# EAGLE board VNH7070AS motor driver (EAGLE 9.5.2)
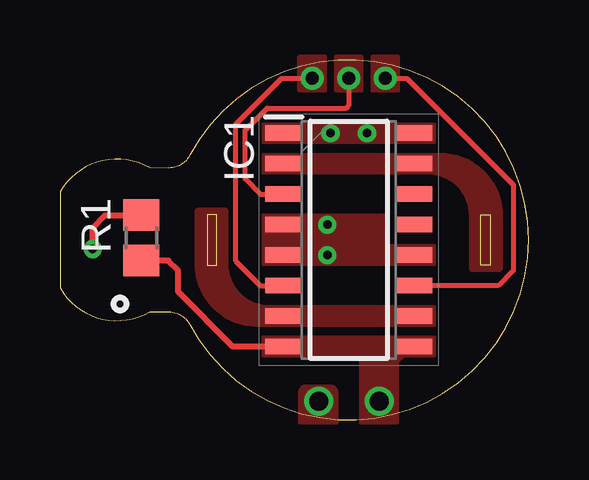
[diagram p0: board, top side]
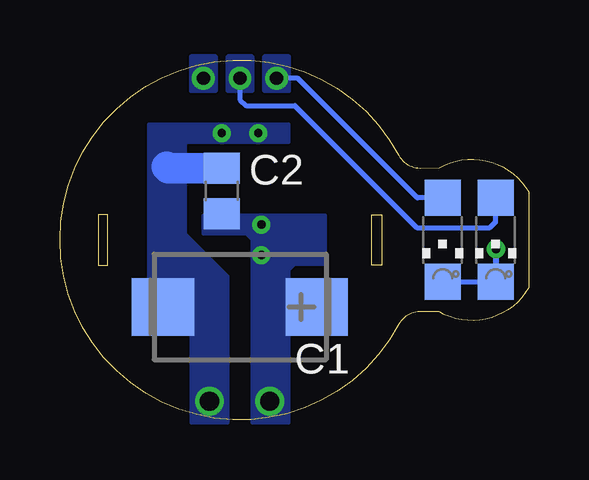
[diagram p1: board, bottom side, seen from below]

Size 19.53 x 14.99 mm. Coordinates in mm from the lower left corner, seen from the top.
Outline: 3.73,10.49 arc90 0,9.49 0,5.5 arc90 3.73,4.5 4.52,4.5 arc-62 5.41,3.97 arc304 5.41,11.02 arc-62 4.52,10.49 3.73,10.49
Outline: 6.53,8.54 6.13,8.54 6.13,6.44 6.53,6.44 6.53,8.54
Outline: 17.53,8.54 17.93,8.54 17.93,6.44 17.53,6.44 17.53,8.54
Copper layers (1*16): Top 0.035mm / dielectric 1.5mm / Bottom 0.035mm
Design rules "default *": minimum track width 6mil, minimum drill 0.35mm, track to track 6mil, track to pad 6mil, pad to pad 6mil, via to via 6mil, smd to smd 6mil, copper to edge 0mil, drill to drill 6mil, minimum pad ring 10mil, minimum via ring 8mil, stop-mask expansion 4mil, vias tented up to drill 0mil, thermal gap 10mil

## Footprints (pad centres in the part's own frame; a part is rotated, then mirrored left to right if it is on the bottom)
CT7343 = smd 2.6 x 2.4: + -3.2,0; - 3.2,0
C0805 = smd 1.3 x 1.5: 1 -0.95,0; 2 0.95,0
SOIC127P600X175-16N = smd 1.525 x 0.65: 1 -2.712,4.445; 2 -2.712,3.175; 3 -2.712,1.905; 4 -2.712,0.635; 5 -2.712,-0.635; 6 -2.712,-1.905; 7 -2.712,-3.175; 8 -2.712,-4.445; 9 2.712,-4.445; 10 2.712,-3.175; 11 2.712,-1.905; 12 2.712,-0.635; 13 2.712,0.635; 14 2.712,1.905; 15 2.712,3.175; 16 2.712,4.445
CHIPLED_1206 = smd 1.5 x 1.5: A 0,-1.75; C 0,1.75
R0805 = smd 1.3 x 1.5: 1 -0.95,0; 2 0.95,0

## Placement (x,y rotation side)
C1  [CT7343]  12.03,4.7 180 bottom
C2  [C0805]  12.79,9.53 90 bottom
IC1  VNH7070ASTR  [SOIC127P600X175-16N]  12.03,7.49 0 top
LED1  [CHIPLED_1206]  1.38,7.49 180 bottom
LED2  [CHIPLED_1206]  3.59,7.49 180 bottom
R1  [R0805]  3.39,7.58 90 top

## Library data of the parts
C1 C2 = rcl; SPICEPREFIX: C
IC1 = VNH7070AS; DESCRIPTION: Motor / Motion / Ignition Controllers & Drivers; HEIGHT: 1.75mm; MANUFACTURER_NAME: STMicroelectronics; MANUFACTURER_PART_NUMBER: VNH7070ASTR; MOUSER_PART_NUMBER: 511-VNH7070ASTR; MOUSER_PRICE-STOCK: https://www.mouser.com/Search/Refine.aspx?Keyword=511-VNH7070ASTR; RS_PART_NUMBER: 1647017P; RS_PRICE-STOCK: http://uk.rs-online.com/web/p/products/1647017P
LED1 LED2 = led
R1 = rcl; SPICEPREFIX: R

## Nets
+12V: C1.+ C2.1 IC1.4 IC1.5 IC1.12
GND: C1.- C2.2 IC1.1 IC1.8 IC1.9 IC1.16 R1.1
IN_A: IC1.3 LED1.A
IN_B: IC1.6 LED2.A
N$3: LED1.C LED2.C R1.2
PWM: IC1.11
V+: IC1.2 IC1.15
V-: IC1.7 IC1.10

## Tracks (layer width: path | path; a pad name or v marks a point on that pad's centre or on a via)
+12V  (via drill 0.35, 0.8)
  other vias: 10.79,0.76 11.14,8.13 11.14,6.86
  pour Top (no thermals): 11.52,-0.13 11.52,1.14 arc90 11.27,1.4 10.25,1.4 arc90 10,1.14 10,-0.13
  pour Bottom (no thermals): 11.52,-0.13 11.52,1.14 arc90 11.27,1.4 10.25,1.4 arc90 10,1.14 10,-0.13
  pour Top (no thermals): 15.59,7.24 13.55,7.24 13.55,8.51 8.47,8.51 8.47,6.48 15.59,6.48
  pour Bottom (no thermals): 10,0.38 11.52,0.38 11.52,7.49 11.78,7.75 13.55,7.75 13.55,8.51 8.47,8.51 8.47,6.48 9.74,6.48 10,6.22
GND  (via drill 0.35, 0.8)
  Top 0.254: IC1.8 7.2,3.05 4.92,5.33 4.92,6.22 4.51,6.63 R1.1
  Bottom 1.27: C2.2 15.01,10.48 15.08,10.54
  other vias: 13.3,0.76 11.27,11.94 12.79,11.94
  pour Top (no thermals): 12.54,-0.13 12.54,1.14 arc-90 12.79,1.4 13.81,1.4 arc-90 14.06,1.14 14.06,-0.13
  pour Bottom (no thermals): 12.54,-0.13 12.54,1.14 arc-90 12.79,1.4 13.81,1.4 arc-90 14.06,1.14 14.06,-0.13
  pour Top (no thermals): 8.47,12.32 15.59,12.32 15.59,11.56 8.47,11.56
  pour Bottom (no thermals): 10,12.32 15.59,12.32 15.59,11.56 10,11.56
  pour Top (no thermals): 8.47,3.43 15.59,3.43 15.59,2.67 14.32,2.67 14.06,2.41 14.06,0.38 12.54,0.38 12.54,2.41 12.28,2.67 8.47,2.67
  pour Bottom (no thermals): 12.54,5.97 14.32,7.75 14.32,8 14.32,12.32 15.84,12.32 15.84,5.46 14.06,3.68 14.06,0.38 12.54,0.38
IN_A  (via drill 0.55)
  Top 0.203: v12.03,14.22 12.03,13.08 11.93,12.98 8.63,12.98 7.71,12.07 7.71,10.03 8.35,9.4 IC1.3
  Bottom 0.203: v12.03,14.22 12.03,13.34 11.78,13.08 9.74,13.08 4.66,8 1.62,8 1.38,8.24 LED1.A
  pour Top (no thermals): 11.52,15.11 12.54,15.11 12.54,13.72 11.52,13.72
  pour Bottom: 11.52,15.11 12.54,15.11 12.54,13.72 11.52,13.72
IN_B  (via drill 0.55)
  Top 0.203: IC1.6 8.35,5.59 7.33,6.6 7.33,12.32 9.24,14.22 v10.51,14.22
  Bottom 0.203: v10.51,14.22 9.62,14.22 4.64,9.24 LED2.A
  pour Top (no thermals): 10,15.11 11.01,15.11 11.01,13.72 10,13.72
  pour Bottom: 10,15.11 11.01,15.11 11.01,13.72 10,13.72
N$3  (via drill 0.35)
  Top 0.203: 3.37,8.51 R1.2
  Top 0.254: v1.36,7.11 1.36,8 1.87,8.51 3.37,8.51
  Bottom 0.203: LED2.C LED1.C 1.36,5.76
  Bottom 0.254: 1.36,5.76 v1.36,7.11
PWM  (via drill 0.55)
  Top 0.203: IC1.11 18.25,5.59 18.89,6.22 18.89,9.78 14.44,14.22 v13.55,14.22
  pour Top (no thermals): 13.05,15.11 14.06,15.11 14.06,13.72 13.05,13.72
  pour Bottom: 13.05,15.11 14.06,15.11 14.06,13.72 13.05,13.72
V+
  pour Top: 17.21,8.76 18.28,8.76 arc-90 18.38,8.66 18.38,6.33 arc-90 18.28,6.22 17.21,6.22 arc-90 17.11,6.33 17.11,8.66 arc-90
  pour Top (no thermals): 18.38,8.51 arc90 15.84,11.05 8.47,11.05 8.47,10.29 15.33,10.29 arc-90 17.11,8.51
V-
  pour Top: 5.78,8.76 6.85,8.76 arc-90 6.95,8.66 6.95,6.33 arc-90 6.85,6.22 5.78,6.22 arc-90 5.68,6.33 5.68,8.66 arc-90
  pour Top (no thermals): 8.73,4.7 15.59,4.7 15.59,3.94 8.22,3.94 arc-90 5.68,6.48 6.95,6.48 arc90